# EAGLE board shieldV6 (EAGLE 8.7.1)
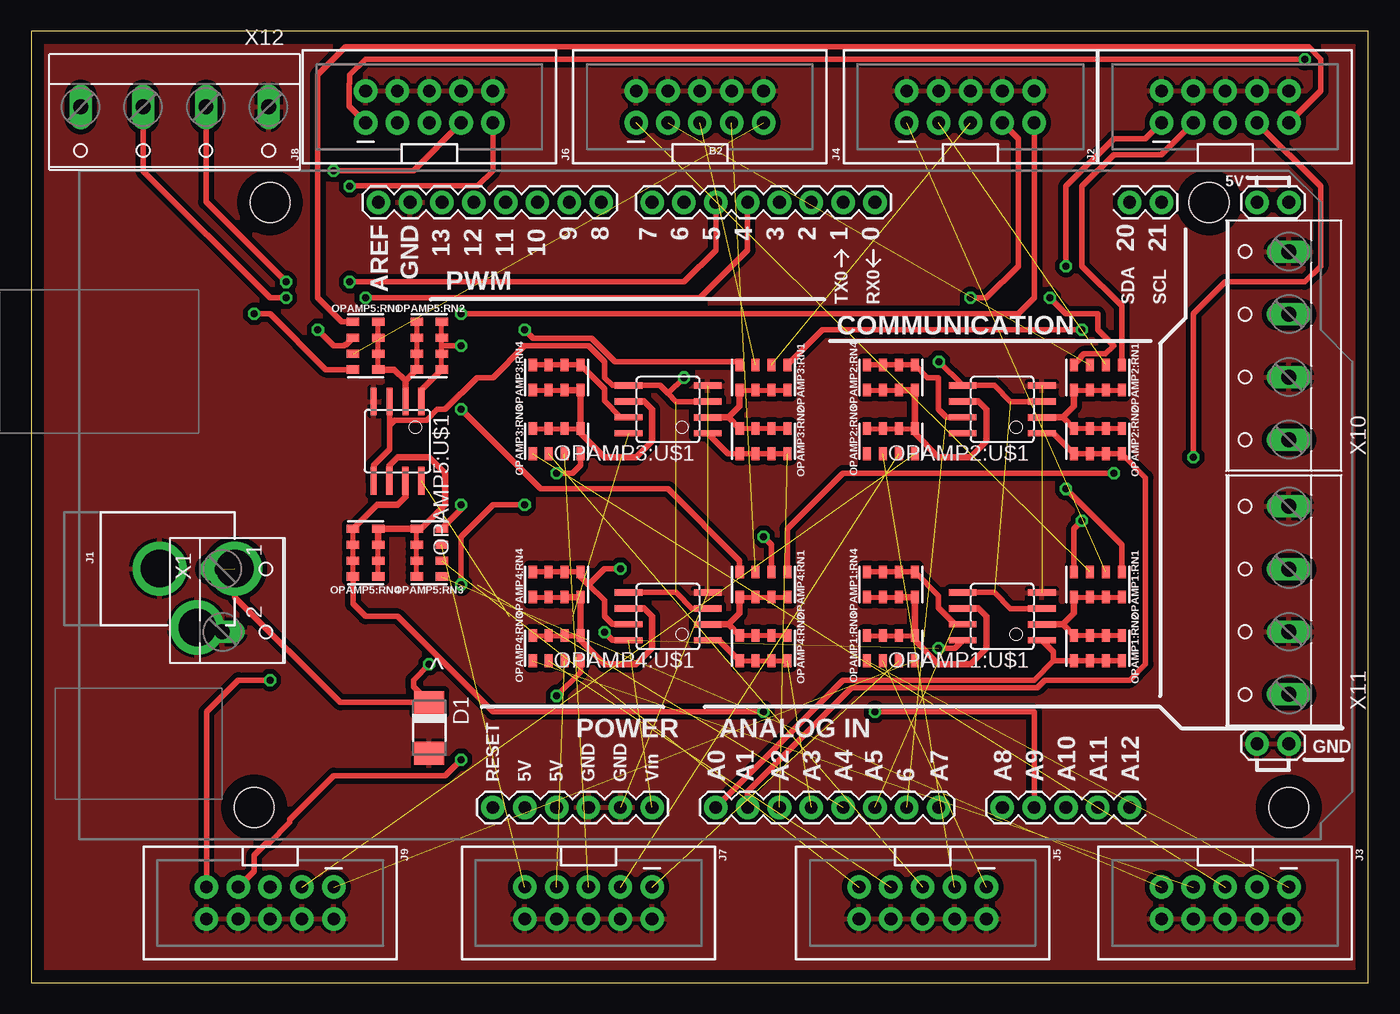
[diagram p0: board, top side]
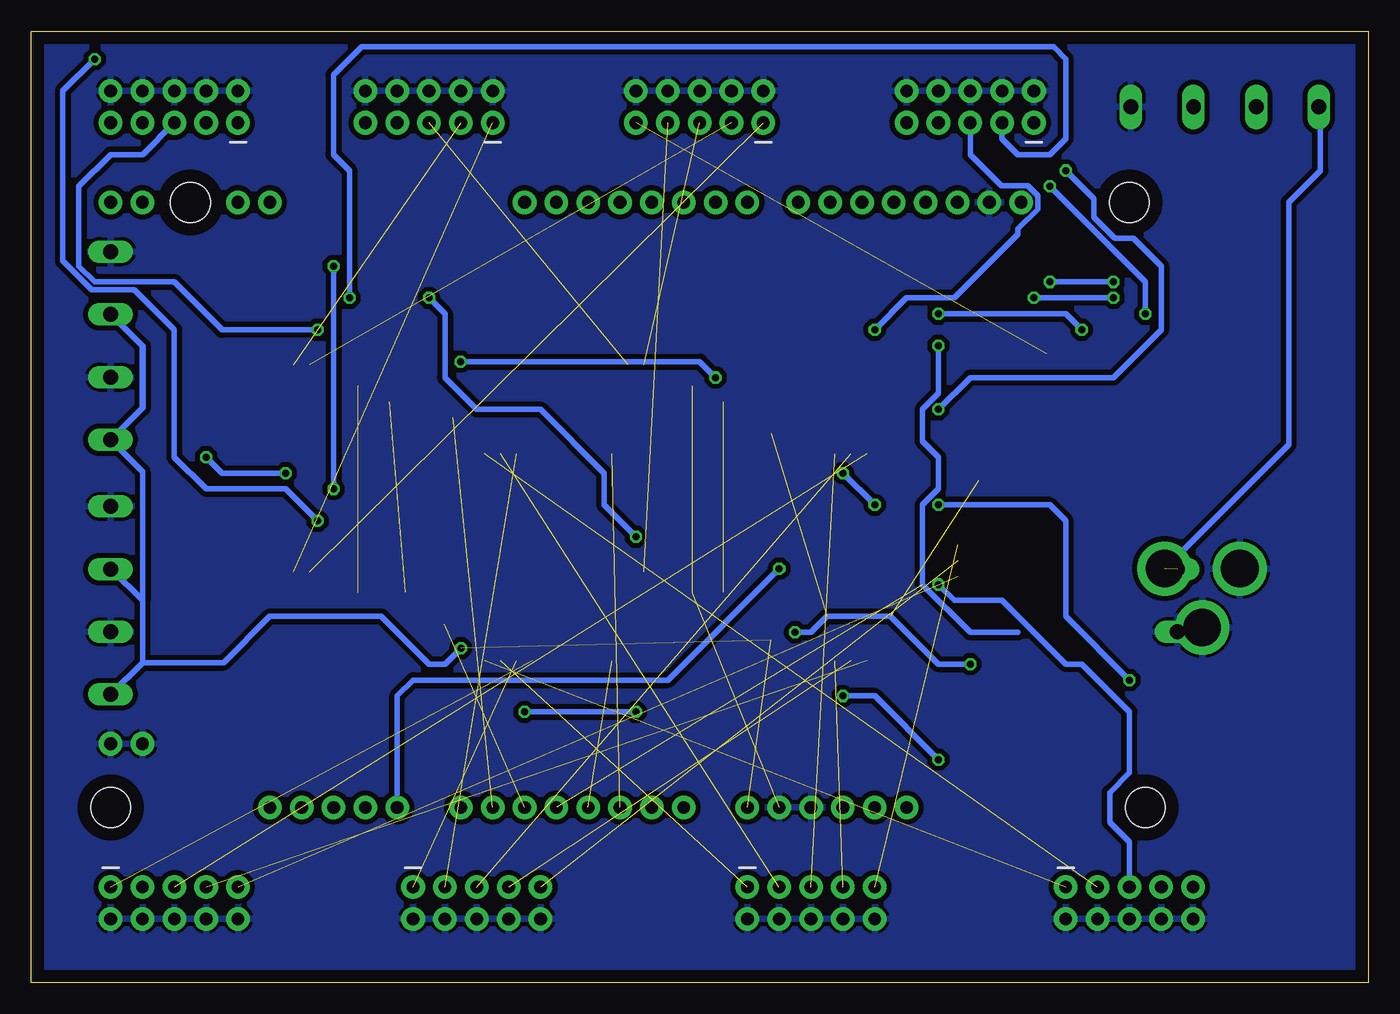
[diagram p1: board, bottom side, seen from below]

Size 106.66 x 75.87 mm. Coordinates in mm from the lower left corner, seen from the top.
Outline: 0,0 106.66,0 106.66,75.87 0,75.87 0,0
Copper layers (1*16): Top 0.035mm / dielectric 1.5mm / Bottom 0.035mm
Design rules "default": minimum track width 6mil, minimum drill 0.35mm, track to track 6mil, track to pad 6mil, pad to pad 6mil, via to via 6mil, smd to smd 6mil, copper to edge 40mil, drill to drill 6mil, minimum pad ring 10mil, minimum via ring 8mil, stop-mask expansion 4mil, vias tented up to drill 0mil, thermal gap 10mil

## Footprints (pad centres in the part's own frame; a part is rotated, then mirrored left to right if it is on the bottom)
ARDUINO_MEGA_EDIT = drill 1.016 pad 1.88: 0 13.97,24.13; 1 11.43,24.13; 2 8.89,24.13; 3 6.35,24.13; 3.3V -13.97,-24.13; 4 3.81,24.13; 5 1.27,24.13; 5V@0 -11.43,-24.13; 5V@1 44.45,24.13; 5V@2 46.99,24.13; 6 -1.27,24.13; 7 -3.81,24.13; 8 -7.874,24.13; 9 -10.414,24.13; 10 -12.954,24.13; 11 -15.494,24.13; 12 -18.034,24.13; 13 -20.574,24.13; 20 34.29,24.13; 21 36.83,24.13; A0 1.27,-24.13; A1 3.81,-24.13; A2 6.35,-24.13; A3 8.89,-24.13; A4 11.43,-24.13; A5 13.97,-24.13; A6 16.51,-24.13; A7 19.05,-24.13; A8 24.13,-24.13; A9 26.67,-24.13; A10 29.21,-24.13; A11 31.75,-24.13; A12 34.29,-24.13; AREF -25.654,24.13; GND@0 -8.89,-24.13; GND@1 -6.35,-24.13; GND@2 44.45,-19.05; GND@3 46.99,-19.05; GND@4 -23.114,24.13; RESET -16.51,-24.13; VIN -3.81,-24.13 | hole 3.2: -34.29,24.13; -35.56,-24.13; 40.64,24.13; 46.99,-24.13
DO-214AC = smd 1.8 x 2.4: A 2.025,0; C -2.025,0
POWER_JACK_PTH = drill 2.997 pad 4.318: GND 0,7.7; GNDBREAK 4.7,10.7; PWR 0,13.7
2X5-SHROUDED = drill 1.016 pad 1.88: 1 -1.27,5.08; 2 1.27,5.08; 3 -1.27,2.54; 4 1.27,2.54; 5 -1.27,0; 6 1.27,0; 7 -1.27,-2.54; 8 1.27,-2.54; 9 -1.27,-5.08; 10 1.27,-5.08
0805-ARV_EDIT10K = smd 0.65 x 1: 1 -1.905,-1; 2 -0.635,-1; 3 0.635,-1; 4 1.905,-1; 5 1.905,1; 6 0.635,1; 7 -0.635,1; 8 -1.905,1
SOIC8 = smd 0.5 x 2.2: 1 -1.905,-3.154; 2 -0.645,-3.154; 3 0.625,-3.154; 4 1.895,-3.154; 5 1.905,3.154; 6 0.635,3.154; 7 -0.635,3.154; 8 -1.905,3.154
W237-102 = drill 1.194 long: 1 -2.5,-1.27; 2 2.5,-1.27
W237-4 = drill 1.194 long: 1 -7.5,-1.27; 2 -2.5,-1.27; 3 2.5,-1.27; 4 7.5,-1.27

## Placement (x,y rotation side)
B2  ARDUINO_MEGA_R3_EDIT  [ARDUINO_MEGA_EDIT]  53.34,38.1 0 top
D1  [DO-214AC]  31.75,20.32 270 top
J1  POWER_JACK  [POWER_JACK_PTH]  2.54,33.02 270 top
J2  AVR_SPI_PROG_5X2_NEWPTH2  [2X5-SHROUDED]  95.25,69.85 90 top
J3  AVR_SPI_PROG_5X2_NEWPTH2  [2X5-SHROUDED]  95.25,6.35 270 top
J4  AVR_SPI_PROG_5X2_NEWPTH2  [2X5-SHROUDED]  74.93,69.85 90 top
J5  AVR_SPI_PROG_5X2_NEWPTH2  [2X5-SHROUDED]  71.12,6.35 270 top
J6  AVR_SPI_PROG_5X2_NEWPTH2  [2X5-SHROUDED]  53.34,69.85 90 top
J7  AVR_SPI_PROG_5X2_NEWPTH2  [2X5-SHROUDED]  44.45,6.35 270 top
J8  AVR_SPI_PROG_5X2_NEWPTH2  [2X5-SHROUDED]  31.75,69.85 90 top
J9  AVR_SPI_PROG_5X2_NEWPTH2  [2X5-SHROUDED]  19.05,6.35 270 top
OPAMP1:RN1  10k  [0805-ARV_EDIT10K]  85.09,31.75 180 top
OPAMP1:RN2  10k  [0805-ARV_EDIT10K]  85.09,26.67 180 top
OPAMP1:RN3  10k  [0805-ARV_EDIT10K]  68.58,26.67 0 top
OPAMP1:RN4  10k  [0805-ARV_EDIT10K]  68.58,31.75 0 top
OPAMP1:U$1  MCP6002SMT  [SOIC8]  77.47,29.21 90 top
OPAMP2:RN1  10k  [0805-ARV_EDIT10K]  85.09,48.26 180 top
OPAMP2:RN2  10k  [0805-ARV_EDIT10K]  85.09,43.18 180 top
OPAMP2:RN3  10k  [0805-ARV_EDIT10K]  68.58,43.18 0 top
OPAMP2:RN4  10k  [0805-ARV_EDIT10K]  68.58,48.26 0 top
OPAMP2:U$1  MCP6002SMT  [SOIC8]  77.47,45.72 90 top
OPAMP3:RN1  10k  [0805-ARV_EDIT10K]  58.42,48.26 180 top
OPAMP3:RN2  10k  [0805-ARV_EDIT10K]  58.42,43.18 180 top
OPAMP3:RN3  10k  [0805-ARV_EDIT10K]  41.91,43.18 0 top
OPAMP3:RN4  10k  [0805-ARV_EDIT10K]  41.91,48.26 0 top
OPAMP3:U$1  MCP6002SMT  [SOIC8]  50.8,45.72 90 top
OPAMP4:RN1  10k  [0805-ARV_EDIT10K]  58.42,31.75 180 top
OPAMP4:RN2  10k  [0805-ARV_EDIT10K]  58.42,26.67 180 top
OPAMP4:RN3  10k  [0805-ARV_EDIT10K]  41.91,26.67 0 top
OPAMP4:RN4  10k  [0805-ARV_EDIT10K]  41.91,31.75 0 top
OPAMP4:U$1  MCP6002SMT  [SOIC8]  50.8,29.21 90 top
OPAMP5:RN1  10k  [0805-ARV_EDIT10K]  26.67,50.8 270 top
OPAMP5:RN2  10k  [0805-ARV_EDIT10K]  31.75,50.8 270 top
OPAMP5:RN3  10k  [0805-ARV_EDIT10K]  31.75,34.29 90 top
OPAMP5:RN4  10k  [0805-ARV_EDIT10K]  26.67,34.29 90 top
OPAMP5:U$1  MCP6002SMT  [SOIC8]  29.21,43.18 180 top
X1  [W237-102]  16.51,30.48 270 top
X10  [W237-4]  99.06,50.8 90 top
X11  [W237-4]  99.06,30.48 90 top
X12  [W237-4]  11.43,68.58 180 top

## Library data of the parts
B2 = SparkFun-Boards
D1 = diode
J1 = SparkFun-Connectors; PROD_ID: CONN-08197
J2-J9 = SparkFun-Connectors; PROD_ID: CONN-08671; SF_ID: PRT-08506
OPAMP1:RN1-OPAMP1:RN4 OPAMP2:RN1-OPAMP2:RN4 OPAMP3:RN1-OPAMP3:RN4 OPAMP4:RN1-OPAMP4:RN4 OPAMP5:RN1-OPAMP5:RN4 = SparkFun-Resistors
OPAMP1:U$1 OPAMP2:U$1 OPAMP3:U$1 OPAMP4:U$1 OPAMP5:U$1 = adam - ics
X1 = con-wago-500; MPN: 237-102; OC_FARNELL: unknown; OC_NEWARK: 70K9898
X10-X12 = con-wago-500; OC_FARNELL: unknown; OC_NEWARK: unknown

## Nets
+5V: B2.VIN D1.C J1.PWR OPAMP1:U$1.8 OPAMP3:U$1.8 OPAMP4:U$1.8 OPAMP5:U$1.8 X1.1 X10.1 X10.3 X11.1 X11.3 X12.4
A1O: B2.A0 OPAMP1:RN2.5 OPAMP1:RN2.6 OPAMP1:RN2.7 OPAMP1:RN2.8 OPAMP1:U$1.1
A2O: B2.A1 OPAMP2:RN2.5 OPAMP2:RN2.6 OPAMP2:RN2.7 OPAMP2:RN2.8 OPAMP2:U$1.1
A3O: B2.A2 OPAMP3:RN2.5 OPAMP3:RN2.6 OPAMP3:RN2.7 OPAMP3:RN2.8 OPAMP3:U$1.1
A4O: B2.A3 OPAMP4:RN2.5 OPAMP4:RN2.6 OPAMP4:RN2.7 OPAMP4:RN2.8 OPAMP4:U$1.1
A5O: B2.A4 OPAMP5:RN2.5 OPAMP5:RN2.6 OPAMP5:RN2.7 OPAMP5:RN2.8 OPAMP5:U$1.1
A6O: B2.A5 OPAMP1:RN4.5 OPAMP1:RN4.6 OPAMP1:RN4.7 OPAMP1:RN4.8 OPAMP1:U$1.7
A7O: B2.A6 OPAMP2:RN4.5 OPAMP2:RN4.6 OPAMP2:RN4.7 OPAMP2:RN4.8 OPAMP2:U$1.7
A8O: B2.A7
A9O: B2.A8 OPAMP4:RN4.5 OPAMP4:RN4.6 OPAMP4:RN4.7 OPAMP4:RN4.8 OPAMP4:U$1.7
A10O: B2.A9 OPAMP5:RN4.5 OPAMP5:RN4.6 OPAMP5:RN4.7 OPAMP5:RN4.8 OPAMP5:U$1.7
CI: B2.4 X12.3
DI: B2.5 X12.2
GND: B2.GND@0 B2.GND@1 B2.GND@2 B2.GND@3 B2.GND@4 D1.A J1.GND J1.GNDBREAK J2.2 J2.4 J2.6 J2.8 J2.10 J3.2 J3.4 J3.6 J3.8 J3.10 J4.2 J4.4 J4.6 J4.8 J4.10 J5.2 J5.4 J5.6 J5.8 J5.10 J6.2 J6.4 J6.6 J6.8 J6.10 J7.2 J7.4 J7.6 J7.8 J7.10 J8.2 J8.4 J8.6 J8.8 J8.10 J9.2 J9.4 J9.6 J9.8 J9.10 OPAMP1:U$1.4 OPAMP2:U$1.4 OPAMP3:U$1.4 OPAMP4:U$1.4 OPAMP5:U$1.4 X1.2 X10.2 X10.4 X11.2 X11.4 X12.1
OPAMP1:N$1: OPAMP1:RN3.5 OPAMP1:RN3.6 OPAMP1:RN3.7 OPAMP1:RN3.8 OPAMP1:RN4.1 OPAMP1:RN4.2 OPAMP1:RN4.3 OPAMP1:RN4.4 OPAMP1:U$1.6
OPAMP1:N$2: OPAMP1:RN1.5 OPAMP1:RN1.6 OPAMP1:RN1.7 OPAMP1:RN1.8 OPAMP1:RN2.1 OPAMP1:RN2.2 OPAMP1:RN2.3 OPAMP1:RN2.4 OPAMP1:U$1.2
OPAMP2:A1: OPAMP2:RN3.1
OPAMP2:N$1: OPAMP2:RN3.5 OPAMP2:RN3.6 OPAMP2:RN3.7 OPAMP2:RN3.8 OPAMP2:RN4.1 OPAMP2:RN4.2 OPAMP2:RN4.3 OPAMP2:RN4.4 OPAMP2:U$1.6
OPAMP2:N$2: OPAMP2:RN1.5 OPAMP2:RN1.6 OPAMP2:RN1.7 OPAMP2:RN1.8 OPAMP2:RN2.1 OPAMP2:RN2.2 OPAMP2:RN2.3 OPAMP2:RN2.4 OPAMP2:U$1.2
OPAMP3:N$1: OPAMP3:RN3.5 OPAMP3:RN3.6 OPAMP3:RN3.7 OPAMP3:RN3.8 OPAMP3:RN4.1 OPAMP3:RN4.2 OPAMP3:RN4.3 OPAMP3:RN4.4 OPAMP3:U$1.6
OPAMP3:N$2: OPAMP3:RN1.5 OPAMP3:RN1.6 OPAMP3:RN1.7 OPAMP3:RN1.8 OPAMP3:RN2.1 OPAMP3:RN2.2 OPAMP3:RN2.3 OPAMP3:RN2.4 OPAMP3:U$1.2
OPAMP3:OUT1: OPAMP3:RN4.5 OPAMP3:RN4.6 OPAMP3:RN4.7 OPAMP3:RN4.8 OPAMP3:U$1.7
OPAMP4:N$1: OPAMP4:RN3.5 OPAMP4:RN3.6 OPAMP4:RN3.7 OPAMP4:RN3.8 OPAMP4:RN4.1 OPAMP4:RN4.2 OPAMP4:RN4.3 OPAMP4:RN4.4 OPAMP4:U$1.6
OPAMP4:N$2: OPAMP4:RN1.5 OPAMP4:RN1.6 OPAMP4:RN1.7 OPAMP4:RN1.8 OPAMP4:RN2.1 OPAMP4:RN2.2 OPAMP4:RN2.3 OPAMP4:RN2.4 OPAMP4:U$1.2
OPAMP5:N$1: OPAMP5:RN3.5 OPAMP5:RN3.6 OPAMP5:RN3.7 OPAMP5:RN3.8 OPAMP5:RN4.1 OPAMP5:RN4.2 OPAMP5:RN4.3 OPAMP5:RN4.4 OPAMP5:U$1.6
OPAMP5:N$2: OPAMP5:RN1.5 OPAMP5:RN1.6 OPAMP5:RN1.7 OPAMP5:RN1.8 OPAMP5:RN2.1 OPAMP5:RN2.2 OPAMP5:RN2.3 OPAMP5:RN2.4 OPAMP5:U$1.2
S1A: J2.1 OPAMP1:RN1.1
S1B: J3.1 OPAMP1:RN3.1
S2A: J2.3 OPAMP2:RN1.1
S2B: J3.3
S3A: J2.5 OPAMP3:RN1.1
S3B: J3.5 OPAMP3:RN3.1
S4A: J2.7 OPAMP4:RN1.1
S4B: J3.7 OPAMP4:RN3.1
S5A: J2.9 OPAMP5:RN1.1
S5B: J3.9 OPAMP5:RN3.1
S6A: J4.1 OPAMP1:RN1.2
S6B: J5.1 OPAMP1:RN3.2
S7A: J4.3 OPAMP2:RN1.2
S7B: J5.3 OPAMP2:RN3.2
S8A: J4.5 OPAMP3:RN1.2
S8B: J5.5 OPAMP3:RN3.2
S9A: J4.7 OPAMP4:RN1.2
S9B: J5.7 OPAMP4:RN3.2
S10A: J4.9 OPAMP5:RN1.2
S10B: J5.9 OPAMP5:RN3.2
S11A: J6.1 OPAMP1:RN1.3
S11B: J7.1 OPAMP1:RN3.3
S12A: J6.3 OPAMP2:RN1.3
S12B: J7.3 OPAMP2:RN3.3
S13A: J6.5 OPAMP3:RN1.3
S13B: J7.5 OPAMP3:RN3.3
S14A: J6.7 OPAMP4:RN1.3
S14B: J7.7 OPAMP4:RN3.3
S15A: J6.9 OPAMP5:RN1.3
S15B: J7.9 OPAMP5:RN3.3
S16A: J8.1 OPAMP1:RN1.4
S16B: J9.1 OPAMP1:RN3.4
S17A: J8.3 OPAMP2:RN1.4
S17B: J9.3 OPAMP2:RN3.4
S18A: J8.5 OPAMP3:RN1.4
S18B: J9.5 OPAMP3:RN3.4
S19A: J8.7 OPAMP4:RN1.4
S19B: J9.7 OPAMP4:RN3.4
S20A: J8.9 OPAMP5:RN1.4
S20B: J9.9 OPAMP5:RN3.4
VCC: OPAMP2:U$1.8
VREF: OPAMP1:U$1.3 OPAMP1:U$1.5 OPAMP2:U$1.3 OPAMP2:U$1.5 OPAMP3:U$1.3 OPAMP3:U$1.5 OPAMP4:U$1.3 OPAMP4:U$1.5 OPAMP5:U$1.3 OPAMP5:U$1.5

## Tracks (layer width: path | path; a pad name or v marks a point on that pad's centre or on a via)
+5V  (via drill 0.56)  (5 unrouted)
  Top 0.457: J1.PWR 16.24,30.75 24.64,22.34 D1.C 30.48,23.62 30.48,24.13 v31.75,25.4 | v72.39,26.67 73.68,26.67 OPAMP1:U$1.8 | OPAMP4:U$1.8 46.35,27.3 v45.72,27.94
  Bottom 0.457: X11.1 97.79,25.52 | 97.79,25.52 97.79,30.48 | 97.79,30.48 100.29,32.98 X11.3 | X10.1 97.79,40.76 97.79,30.48 | J1.PWR 6.35,42.91 6.35,62.23 3.81,64.77 3.81,69.73 X12.4 | 97.79,25.52 91.32,25.52 87.63,29.21 78.74,29.21 74.93,25.4 73.66,25.4 v72.39,26.67 | v45.72,27.94 44.45,27.94 43.18,29.21 38.1,29.21 34.29,25.4 v31.75,25.4
  Bottom 0.508: X10.1 97.79,45.84 97.79,50.76 X10.3
A1O
  Top 0.457: 81.55,25.67 80.01,24.13 64.77,24.13 B2.A0 | 81.55,25.67 OPAMP1:RN2.5 OPAMP1:RN2.6 OPAMP1:RN2.7 OPAMP1:RN2.8 | OPAMP1:U$1.1 81.55,26.38 81.55,25.67
A2O
  Top 0.457: OPAMP2:U$1.1 81.55,43.81 OPAMP2:RN2.5 OPAMP2:RN2.6 OPAMP2:RN2.7 OPAMP2:RN2.8 88.9,40.27 88.9,25.4 87.63,24.13 80.87,24.13 80.26,23.52 65.43,23.52 57.15,15.24 B2.A1
A3O  (1 unrouted)
  Top 0.457: OPAMP3:U$1.1 55.59,42.18 OPAMP3:RN2.5 OPAMP3:RN2.6 OPAMP3:RN2.7 OPAMP3:RN2.8
A4O  (1 unrouted)
  Top 0.406: OPAMP4:RN2.5 OPAMP4:RN2.6 OPAMP4:RN2.7 OPAMP4:RN2.8
  Top 0.508: OPAMP4:U$1.1 54.88,27.3 OPAMP4:RN2.5
A5O  (via drill 0.56)  (1 unrouted)
  Top 0.406: OPAMP5:RN2.5 OPAMP5:RN2.6 32.75,50.8 OPAMP5:RN2.7 OPAMP5:RN2.8
  Top 0.457: 32.75,50.8 v34.29,50.8
  Top 0.508: OPAMP5:U$1.1 31.12,47.26 OPAMP5:RN2.5
  Bottom 0.457: v34.29,50.8 34.29,46.99 35.56,45.72 35.56,43.18 34.29,41.91 34.29,39.37 35.56,38.1 35.56,31.75 31.75,27.94 27.94,27.94
A6O  (1 unrouted)
  Top 0.457: OPAMP1:U$1.7 73.7,28.58 72.39,29.88 72.39,30.84 OPAMP1:RN4.5 OPAMP1:RN4.6 OPAMP1:RN4.7 OPAMP1:RN4.8
A7O  (1 unrouted)
  Top 0.457: OPAMP2:RN4.8 OPAMP2:RN4.7 OPAMP2:RN4.6 OPAMP2:RN4.5 71.48,48.26 72.39,48.26 72.39,45.72 73.03,45.09 OPAMP2:U$1.7
A9O  (via drill 0.56)
  Top 0.457: 44.45,31.75 43.82,32.38 OPAMP4:RN4.5 OPAMP4:RN4.6 OPAMP4:RN4.7 OPAMP4:RN4.8 | 44.45,31.75 45.72,30.48 45.72,29.21 46.35,28.58 OPAMP4:U$1.7 | v46.99,33.02 45.72,33.02 44.45,31.75
  Bottom 0.457: B2.A8 77.47,22.86 76.2,24.13 55.88,24.13 v46.99,33.02
A10O  (via drill 0.56)
  Top 0.406: OPAMP5:RN4.8 OPAMP5:RN4.7 OPAMP5:RN4.6 OPAMP5:RN4.5
  Top 0.457: 80.01,20.32 B2.A9 80.01,21.59 v67.31,21.59 | v58.42,21.59 36.83,21.59 29.21,29.21 26.67,29.21 25.67,30.21 OPAMP5:RN4.8
  Top 0.508: OPAMP5:RN4.5 27.57,38.1 29.21,38.1 29.84,38.73 OPAMP5:U$1.7
  Bottom 0.457: v67.31,21.59 v58.42,21.59
CI  (via drill 0.56)
  Top 0.457: X12.3 8.93,64.73 19.05,54.61 v20.32,54.61 | v26.67,54.61 53.34,54.61 57.15,58.42 B2.4
  Bottom 0.457: v20.32,54.61 v26.67,54.61
DI  (via drill 0.56)
  Top 0.457: X12.2 13.93,62.27 v20.32,55.88 | v25.4,55.88 52.07,55.88 54.61,58.42 B2.5
  Bottom 0.457: v20.32,55.88 v25.4,55.88
GND  (3 unrouted)
  pour Top (isolate 0.406): 0,76.2 106.68,76.2 106.68,0 0,0
  pour Bottom (isolate 0.406): 0,76.2 106.68,76.2 106.68,0 0,0
OPAMP1:N$1
  Top 0.406: OPAMP1:RN3.8 OPAMP1:RN3.7 OPAMP1:RN3.6 OPAMP1:RN3.5 | OPAMP1:RN4.1 OPAMP1:RN4.2 OPAMP1:RN4.3
  Top 0.508: OPAMP1:U$1.6 75.56,29.84 76.2,29.21 76.2,26.67 74.93,25.4 72.39,25.4 70.48,27.3 OPAMP1:RN3.5 OPAMP1:RN4.4 OPAMP1:RN4.3
OPAMP1:N$2
  Top 0.406: OPAMP1:RN1.5 OPAMP1:RN1.6 OPAMP1:RN1.7 OPAMP1:RN1.8 | OPAMP1:RN2.1 OPAMP1:RN2.2 OPAMP1:RN2.3 OPAMP1:RN2.4
  Top 0.508: OPAMP1:U$1.2 82.29,28.56 | 82.29,28.56 OPAMP1:RN2.4 | OPAMP1:RN1.5 83.19,29.46 82.29,28.56
OPAMP2:N$1
  Top 0.406: OPAMP2:RN3.8 OPAMP2:RN3.7 OPAMP2:RN3.6 OPAMP2:RN3.5 | OPAMP2:RN4.1 OPAMP2:RN4.2 OPAMP2:RN4.3
  Top 0.508: OPAMP2:U$1.6 75.56,46.36 76.2,45.72 76.2,43.18 74.93,41.91 72.39,41.91 70.48,43.81 OPAMP2:RN3.5 OPAMP2:RN4.4 OPAMP2:RN4.3
OPAMP2:N$2
  Top 0.406: OPAMP2:RN1.5 OPAMP2:RN1.6 OPAMP2:RN1.7 OPAMP2:RN1.8 | OPAMP2:RN2.1 OPAMP2:RN2.2 OPAMP2:RN2.3 OPAMP2:RN2.4
  Top 0.508: OPAMP2:U$1.2 82.29,45.08 | 82.29,45.08 OPAMP2:RN2.4 | OPAMP2:RN1.5 83.19,45.97 82.29,45.08
OPAMP3:N$1
  Top 0.406: OPAMP3:RN3.8 OPAMP3:RN3.7 OPAMP3:RN3.6 OPAMP3:RN3.5 | OPAMP3:RN4.1 OPAMP3:RN4.2 OPAMP3:RN4.3
  Top 0.508: OPAMP3:U$1.6 48.9,46.36 49.53,45.72 49.53,43.18 48.26,41.91 45.72,41.91 43.82,43.81 OPAMP3:RN3.5 OPAMP3:RN4.4 OPAMP3:RN4.3
OPAMP3:N$2
  Top 0.406: OPAMP3:RN1.5 OPAMP3:RN1.6 OPAMP3:RN1.7 OPAMP3:RN1.8 | OPAMP3:RN2.1 OPAMP3:RN2.2 OPAMP3:RN2.3 OPAMP3:RN2.4
  Top 0.508: OPAMP3:U$1.2 55.62,45.08 | 55.62,45.08 OPAMP3:RN2.4 | OPAMP3:RN1.5 56.51,45.97 55.62,45.08
OPAMP3:OUT1
  Top 0.457: OPAMP3:RN4.8 OPAMP3:RN4.7 OPAMP3:RN4.6 OPAMP3:RN4.5 45.72,47.36 45.72,46.39 47.03,45.09 OPAMP3:U$1.7
OPAMP4:N$1
  Top 0.406: OPAMP4:RN3.8 OPAMP4:RN3.7 OPAMP4:RN3.6 OPAMP4:RN3.5 | OPAMP4:RN4.1 OPAMP4:RN4.2 OPAMP4:RN4.3
  Top 0.508: OPAMP4:U$1.6 48.9,29.84 49.53,29.21 49.53,26.67 48.26,25.4 45.72,25.4 43.82,27.3 OPAMP4:RN3.5 OPAMP4:RN4.4 OPAMP4:RN4.3
OPAMP4:N$2
  Top 0.406: OPAMP4:RN1.5 OPAMP4:RN1.6 OPAMP4:RN1.7 OPAMP4:RN1.8 | OPAMP4:RN2.1 OPAMP4:RN2.2 OPAMP4:RN2.3 OPAMP4:RN2.4
  Top 0.508: OPAMP4:U$1.2 55.62,28.56 | 55.62,28.56 OPAMP4:RN2.4 | OPAMP4:RN1.5 56.51,29.46 55.62,28.56
OPAMP5:N$1
  Top 0.406: OPAMP5:RN3.8 OPAMP5:RN3.7 OPAMP5:RN3.6 OPAMP5:RN3.5 | OPAMP5:RN4.1 OPAMP5:RN4.2 OPAMP5:RN4.3
  Top 0.508: OPAMP5:U$1.6 28.57,41.27 29.21,41.91 31.75,41.91 33.02,40.64 33.02,38.1 31.12,36.2 OPAMP5:RN3.5 OPAMP5:RN4.4 OPAMP5:RN4.3
OPAMP5:N$2
  Top 0.406: OPAMP5:RN1.5 OPAMP5:RN1.6 OPAMP5:RN1.7 OPAMP5:RN1.8 | OPAMP5:RN2.1 OPAMP5:RN2.2 OPAMP5:RN2.3 OPAMP5:RN2.4
  Top 0.508: OPAMP5:U$1.2 29.85,48 | 29.85,48 OPAMP5:RN2.4 | OPAMP5:RN1.5 28.96,48.9 29.85,48
S1A  (via drill 0.56)
  Top 0.457: J2.1 88.9,67.31 86.36,67.31 82.55,63.5 v82.55,57.15 | v82.55,39.37 87,34.93 OPAMP1:RN1.1
  Bottom 0.457: v82.55,57.15 v82.55,39.37
S1B  (1 unrouted)
S2A
  Top 0.457: OPAMP2:RN1.1 87,53.97 83.82,57.15 83.82,63.5 86.36,66.04 90.17,66.04 J2.3
S3A  (via drill 0.56)
  Top 0.457: OPAMP3:RN1.1 63.13,52.07 v83.82,52.07
  Bottom 0.457: J2.5 97.79,66.04 100.33,66.04 102.87,63.5 102.87,57.15 101.6,55.88 95.25,55.88 91.44,52.07 v83.82,52.07
S3B  (1 unrouted)
S4A  (via drill 0.56)
  Top 0.457: J2.7 102.87,63.5 102.87,57.15 101.6,55.88 95.25,55.88 92.71,53.34 v92.71,41.91 | v86.36,40.64 64.77,40.64 60.32,36.2 OPAMP4:RN1.1
  Bottom 0.457: v92.71,41.91 91.44,40.64 v86.36,40.64
S4B  (1 unrouted)
S5A
  Top 0.457: J2.9 102.87,71.12 102.87,73.66 101.91,74.62 25.09,74.62 22.86,72.39 22.86,54.61 24.77,52.7 OPAMP5:RN1.1
S5B  (1 unrouted)
S6A  (1 unrouted)
S6B  (1 unrouted)
S7A  (1 unrouted)
S7B  (1 unrouted)
S8A  (1 unrouted)
S8B  (1 unrouted)
S9A  (via drill 0.56)
  Top 0.457: J4.7 78.74,67.31 78.74,57.15 76.2,54.61 v74.93,54.61 | v58.42,35.56 59.05,34.93 OPAMP4:RN1.2
  Bottom 0.457: v74.93,54.61 73.66,53.34 73.66,48.26 71.12,45.72 66.04,45.72 60.96,40.64 60.96,38.1 v58.42,35.56
S9B  (1 unrouted)
S10A  (via drill 0.56)
  Top 0.457: J4.9 80.01,54.61 78.74,53.34 v34.29,53.34 | v22.86,52.07 24.13,50.8 24.94,50.8 25.01,50.87 25.11,50.87 OPAMP5:RN1.2
  Bottom 0.457: v34.29,53.34 24.13,53.34 v22.86,52.07
S10B  (1 unrouted)
S11A  (1 unrouted)
S11B  (1 unrouted)
S12A  (1 unrouted)
S12B  (1 unrouted)
S13A  (1 unrouted)
S13B  (1 unrouted)
S14A  (1 unrouted)
S14B  (1 unrouted)
S15A  (1 unrouted)
S15B  (1 unrouted)
S16A  (via drill 0.56)
  Top 0.457: J8.1 25.35,69.9 25.35,71.67 25.4,71.72 25.4,72.39 26.67,73.66 v101.6,73.66 | v83.82,36.83 83.19,36.2 OPAMP1:RN1.4
  Bottom 0.457: v101.6,73.66 104.14,71.12 104.14,57.56 101.85,55.27 98.45,55.27 95.25,52.07 95.25,41.91 92.71,39.37 86.36,39.37 v83.82,36.83
S16B  (1 unrouted)
S17A  (via drill 0.56)
  Top 0.457: v81.28,54.61 82.55,53.34 85.09,53.34 85.09,52.07 86.36,50.8 85.7,50.14 83.97,50.14 83.75,49.92 83.75,49.82 OPAMP2:RN1.4
  Bottom 0.457: J8.3 29.21,67.31 27.94,66.04 25.4,66.04 24.13,67.31 24.13,73.66 25.09,74.62 80.31,74.62 82.55,72.39 82.55,66.04 81.28,64.77 v81.28,54.61
S17B  (1 unrouted)
S18A  (via drill 0.56)
  Top 0.457: v39.37,52.07 40.03,51.41 44.7,51.41 46.58,49.53 56.24,49.53 OPAMP3:RN1.4
  Bottom 0.457: J8.5 31.75,66.04 29.26,63.55 27.14,63.55 26.37,62.78 26.37,61.68 27.94,60.11 27.94,59.69 33.02,54.61 36.83,54.61 v39.37,52.07
S18B  (via drill 0.56)
  Top 0.457: v34.29,31.75 34.29,35.56 36.83,38.1 v39.37,38.1 | v41.91,40.64 43.18,40.64 43.82,41.27 OPAMP3:RN3.4
  Bottom 0.457: J9.5 19.05,11.22 20.62,12.79 20.62,15.15 19.05,16.72 19.05,21.59 22.86,25.4 24.13,25.4 29.21,30.48 33.02,30.48 v34.29,31.75 | v39.37,38.1 v41.91,40.64
S19A  (via drill 0.56)
  Top 0.457: J8.7 30.48,64.77 v24.13,64.77 | OPAMP4:RN1.4 56.51,33.66 50.8,39.37 40.64,39.37 v34.29,45.72
  Bottom 0.457: v24.13,64.77 21.89,62.53 21.89,61.05 20.23,59.39 18.74,59.39 16.51,57.15 16.51,52.07 20.32,48.26 31.75,48.26 v34.29,45.72
S19B  (via drill 0.56)
  Top 0.457: J9.7 17.78,8.89 17.78,10.16 18.74,11.12 18.96,11.12 20.62,12.79 20.62,13.01 24.13,16.51 33.02,16.51 v34.29,17.78 | v41.91,22.86 43.82,24.77 OPAMP4:RN3.4
  Bottom 0.457: v34.29,17.78 39.37,22.86 v41.91,22.86
S20A  (via drill 0.56)
  Top 0.457: J8.9 36.83,64.77 35.61,63.55 25.45,63.55 v25.4,63.5 | v17.78,53.34 19.05,53.34 23.49,48.9 OPAMP5:RN1.4
  Bottom 0.457: v25.4,63.5 17.78,55.88 v17.78,53.34
S20B  (via drill 0.56)
  Top 0.457: J9.9 13.97,21.59 16.51,24.13 v19.05,24.13 | v34.29,38.1 34.29,37.73 OPAMP5:RN3.4
  Bottom 0.457: v19.05,24.13 24.13,29.21 24.13,36.83 25.4,38.1 v34.29,38.1
VREF  (via drill 0.56)  (2 unrouted)
  Top 0.457: OPAMP3:U$1.3 51.45,46.34 50.8,46.99 | 50.8,46.99 50.16,47.62 OPAMP3:U$1.5 46.35,47.62 45.72,48.26 45.72,49.53 44.45,50.8 39.37,50.8 36.83,48.26 35.56,48.26 33.02,45.72 32.39,45.72 31.52,44.85 28.99,44.85 28.59,44.45 | OPAMP2:U$1.3 78.12,46.34 76.84,47.62 OPAMP2:U$1.5 v72.41,49.53 72.39,49.53 | v52.07,48.26 50.8,46.99 | OPAMP1:U$1.3 78.12,29.84 76.84,31.12 OPAMP1:U$1.5 | OPAMP4:U$1.5 51.43,31.12 52.71,29.84 OPAMP4:U$1.3 | OPAMP5:U$1.5 27.3,41.27 28.59,42.55 28.59,44.45 | 28.59,44.45 OPAMP5:U$1.3
  Bottom 0.457: v72.41,49.53 53.34,49.53 v52.07,48.26

## Text on the board
tPlace: ^